# Altium PCB HLib-Sensor-Accel_Gyro-Pressure.PcbDoc
Units mil, origin at the board's own origin, x right, y up, seen from the top; angles counter-clockwise.
Board outline 828 x 2360 mil, 2 copper layers (Top Layer, Bottom Layer); 27 components, 19 nets, 98 pads, 20 vias.
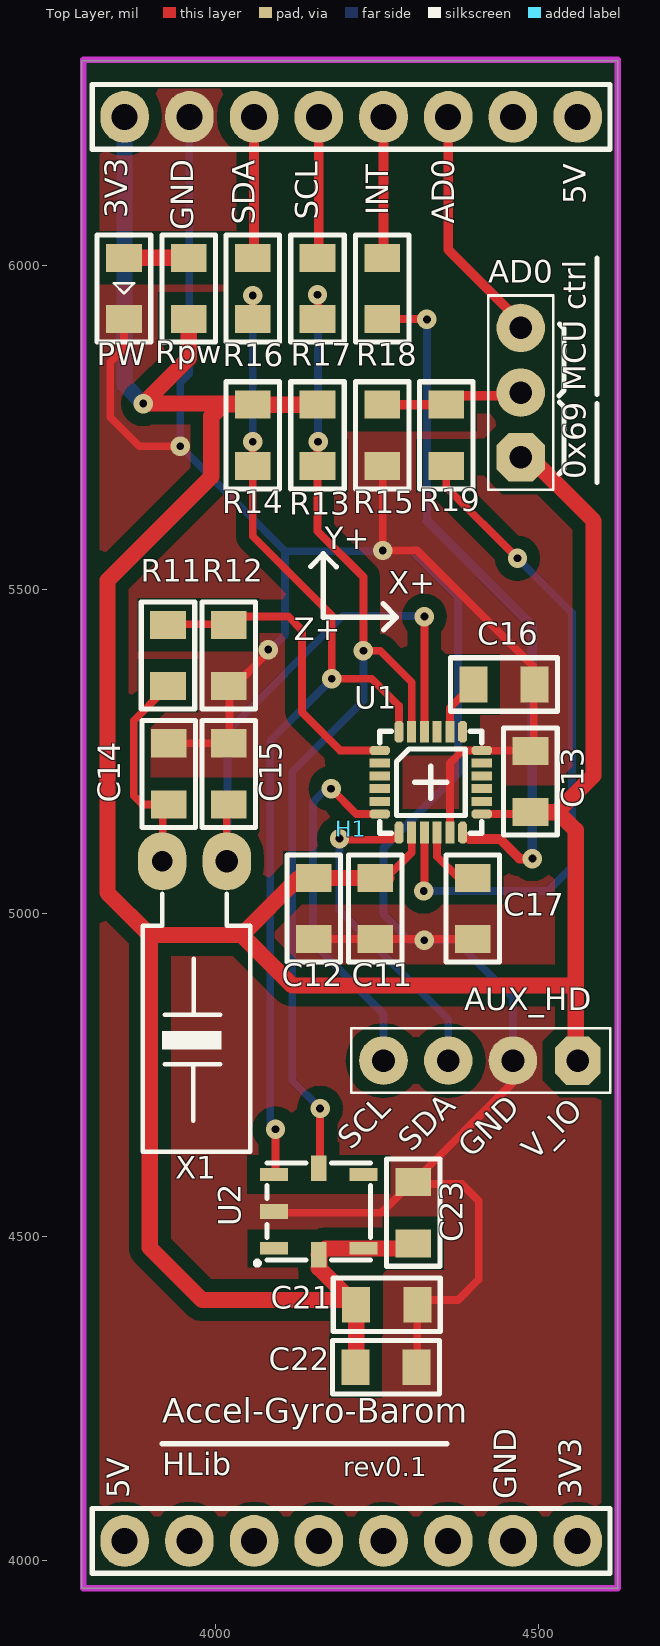
[diagram p0: Top Layer view]
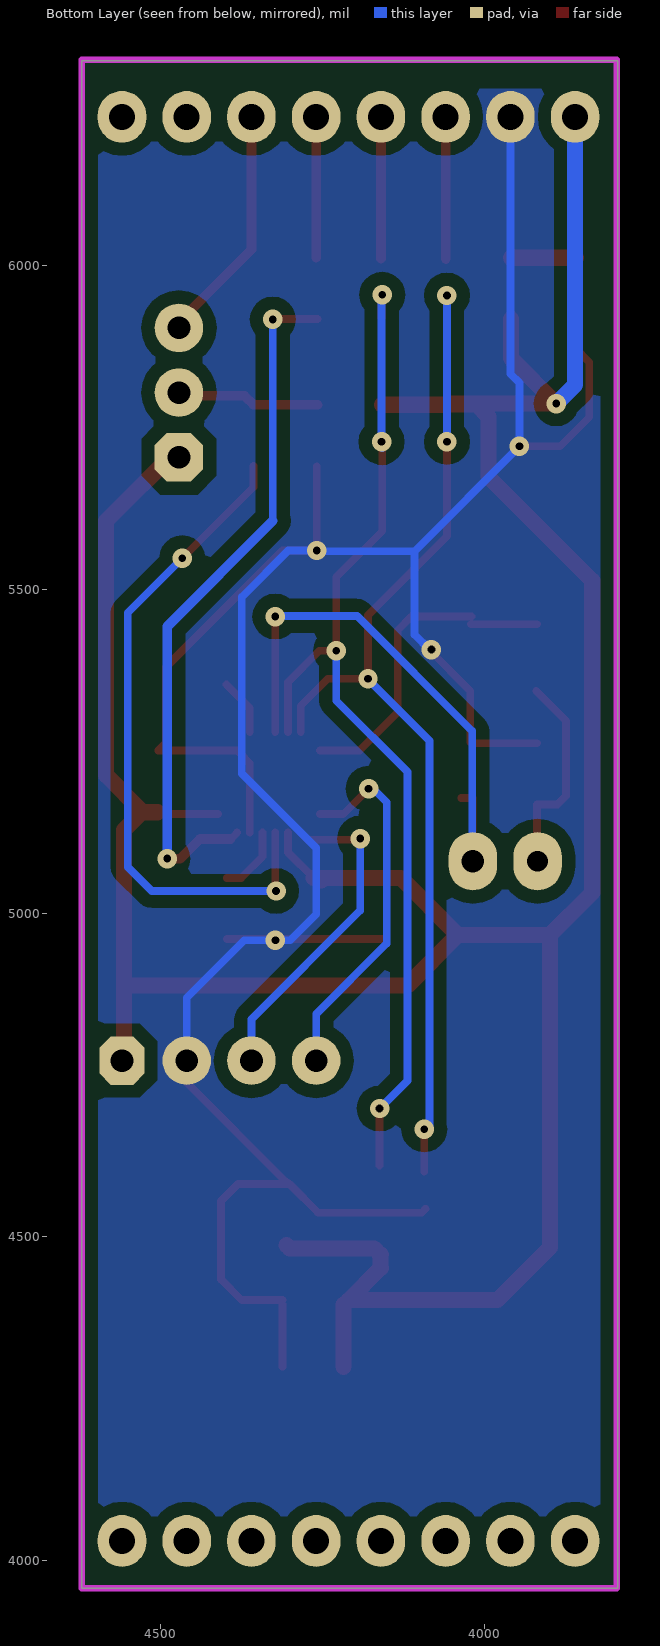
[diagram p1: Bottom Layer view, seen from below]
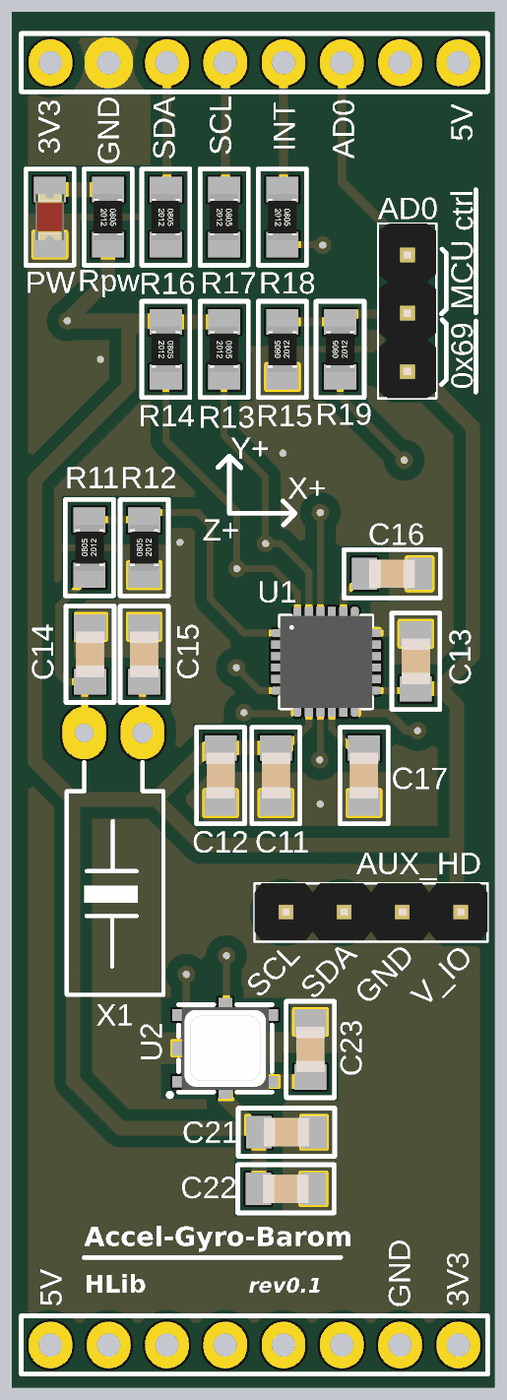
[diagram p2: 3D render of the assembled board from above, using the file's embedded part models]

## Layer stack, top to bottom
Top Layer: signal copper 1.4
Dielectric: core 12.6, FR-4, Dk 4.8
Bottom Layer: signal copper 1.4

## Board outline
3794,6317 4622,6317 4622,3957 3794,3957

## Design rules (kind name [scope] priority, off if disabled: settings)
Clearance [All] p1: gap=20
PolygonConnect [All] p1: connectstyle=Direct reliefconductorwidth=10 reliefentries=4 polygonreliefangle="90 Angle" airgapwidth=10
RoutingVias [All] p1: holewidth=12 width=30 viastyle="Through Hole" minholewidth=10 minwidth=25 maxholewidth=28 maxwidth=50
SolderMaskExpansion [All] p1: expansion=4
Width [All] p1: maxlimit=25 minlimit=12 preferedwidth=12
28 further rules are at their usual default settings.

## Components (designator, comment, footprint, x,y, rotation, side; value= is the part's Value field where it differs from the comment)
AD0 "HEADER 3" HD_MALE_3 4472,5704 r90 top
AUX_HD "HEADER 4" HD_MALE_4 4560,4772 r180 top
C11 "CAP" SM_0805_C_CERAMIC 4247,5007 r90 top
C12 "CAP" SM_0805_C_CERAMIC 4152,5007 r90 top
C13 "CAP" SM_0805_C_CERAMIC 4487,5203 r270 top
C14 "CAP" SM_0805_C_CERAMIC 3928,5215 r270 top
C15 "CAP" SM_0805_C_CERAMIC 4021,5215 r270 top
C16 "CAP" SM_0805_C_CERAMIC 4446,5353 r180 top
C17 "CAP" SM_0805_C_CERAMIC 4398,5007 r90 top
C21 "CAP" SM_0805_C_CERAMIC 4265,4395 r180 top
C22 "CAP" SM_0805_C_CERAMIC 4264,4298 r180 top
C23 "CAP" SM_0805_C_CERAMIC 4306,4537 r270 top
H1 "MBoard1_BH_DualPorts" MBoard1_BH_DualPorts 3860,6230 r0 top
PW "LED" SM_0805_LED 3859,5965 r270 top
R11 "R" SM_0805_R 3927,5398 r90 top
R12 "R" SM_0805_R 4021,5398 r90 top
R13 "R" SM_0805_R 4158,5738 r270 top
R14 "R" SM_0805_R 4058,5738 r270 top
R15 "R" SM_0805_R 4258,5738 r90 top
R16 "R" SM_0805_R 4058,5965 r270 top
R17 "R" SM_0805_R 4158,5965 r270 top
R18 "R" SM_0805_R 4258,5965 r270 top
R19 "R" SM_0805_R 4357,5738 r90 top
Rpw "R" SM_0805_R 3959,5965 r270 top
U1 "MPU-6050" QFN-24 4333,5202 r0 top
U2 "BMP180" LGA-7 4160,4539 r90 top
X1 "32,768 Khz" XT32k 4018,5080 r270 top

## Footprints (in the part's own frame and the unit in brackets; to place one, negate y for a bottom-side part, rotate by r counter-clockwise, add the part's x,y. Pads: shape width x height; smd on the part's side, far side on the other; paste and mask are expansions set on the pad)
HD_MALE_3 [mil]
  oct 75x75 hole 35: 1(0,0)
  round 75 hole 35: 2(100,0) 3(200,0)
  silkscreen extent -50,-50 250,50, body extent -50,-50 250,49, height 323
HD_MALE_4 [mil]
  oct 70x75 hole 35: 1(0,0)
  round 75 hole 35: 2(100,0) 3(200,0) 4(300,0)
  silkscreen extent -50,-50 350,50, body extent -50,-50 350,48, height 323
LGA-7 [mm] "LGA 7pins 3.6x3.8x0.93 (mm)"
  rect 0.5x1.1 smd: 1(-1.45,1.75) 3(-1.45,-1.75) 4(1.45,-1.75) 6(1.45,1.75)
  rect 1x0.6 smd: 2(-1.7,0) 5(1.7,0)
  rect 0.6x1.1 smd: 7(0,1.75)
  silkscreen extent -2.08,-2.03 1.91,2.46, body extent -1.8,-1.9 1.8,1.9, height 0.98
MBoard1_BH_DualPorts [mil]
  oval 75x80 hole 40.16: 1(0,0) 2(100,0) 3(200,0) 4(300,0) 5(400,0) 6(500,0) 7(600,0) 8(700,0) 9(700,-2200) 10(600,-2200) 11(500,-2200) 12(400,-2200) 13(300,-2200) 14(200,-2200) 15(100,-2200) 16(0,-2200)
  silkscreen extent -50,-2250 750,50, body extent -50,-2250 750,50, height 315
QFN-24 [mm] "24 Lead QFN (4x4x0.9) mm"
  oct 0.8x0.35 smd: 1(-2,1.25) 6(-2,-1.25) 13(2,-1.25) 18(2,1.25)
  rect 0.8x0.35 smd: 2(-2,0.75) 3(-2,0.25) 4(-2,-0.25) 5(-2,-0.75) 14(2,-0.75) 15(2,-0.25) 16(2,0.25) 17(2,0.75)
  oct 0.35x0.85 smd: 7(-1.25,-1.975) 12(1.25,-1.975) 19(1.25,1.975) 24(-1.25,1.975)
  rect 0.35x0.85 smd: 8(-0.75,-1.975) 9(-0.25,-1.975) 10(0.25,-1.975) 11(0.75,-1.975) 20(0.75,1.975) 21(0.25,1.975) 22(-0.25,1.975) 23(-0.75,1.975)
  silkscreen extent -2,-2 2,2, body extent -2,-2 2,2, height 0.9
SM_0805_C_CERAMIC [mm] "General Surface-mount cap, low density"
  rect 1.1x1.4 smd: 1(-1.2,0) 2(1.2,0)
  silkscreen extent -2.1,-1.05 2.1,1.05, body extent -1,-0.62 1,0.63, height 0.58
SM_0805_LED [mm] "General polarized surface-mount Led, low density"
  rect 1.1x1.4 smd: 1(-1.2,0) 2(1.2,0)
  silkscreen extent -2.1,-1.05 2.1,1.05, body extent -1.01,-0.62 1.01,0.63, height 1.1
SM_0805_R [mm] "General Surface-mount resistor, low density"
  rect 1.1x1.4 smd: 1(-1.2,0) 2(1.2,0)
  silkscreen extent -2.1,-1.05 2.1,1.05, body extent -1,-0.63 1,0.62, height 0.45
XT32k [mil] "Crystal 32k, 2 pin, real timer for DS1307"
  oval 90x75 hole 35: 1(0,0)
  oval 90x75 hole 32: 2(0,-100)
  silkscreen extent 50,-130 449,36

## Part data
AD0: library part HD_3, "Header single row 3 pins"
AUX_HD: library part HD_4, "Header single row 4 pins"
C11 C12 C13 C14 C15 C16 C17 C21 C22 C23: "Capacitor"
R11 R12 R13 R14 R15 R16 R17 R18 R19 Rpw: "Resistor"
U1: library part MPU_6050, "Motion processing unit"
U2: "Bosch's Digital pressure sensor"
X1: library part XT32k, "Crystal 32,768kHz for timer real"

## Via types
v1: diameter 30, hole 12, Top Layer to Bottom Layer, tented both sides, 20 vias

## Nets (pads, with @x,y where several pads share a name; then routed paths per layer and width w, separated by ;. In a path a pad name is that pad's centre, name@x,y a point inside that pad or via, vN(x,y) a via of type N, cw(c..) or ccw(c..) an arc to the next point about the centre after c; other vN are vias at no path point)
3V3: AD0.1 AUX_HD.1 C11.2 C12.2 C13.2 C21.2 C22.2 C23.2 H1.1 R13.1 R14.1 Rpw.2 U1.8 U1.13 U2.2 U2.3 | length 5190.3
  Top Layer w12: C11.2@4264.24,5054.24 4303.47,5093.47 U1.8 ; U1.13 C13.2@4505,5152.79
  Top Layer w25: Rpw.2 3959,5857 v1(3889,5787) R14.1@4054,5787 ; R14.1@4055,5786 4013,5786 3994,5767 3994,5674 3833.5,5513.5 3833.5,5031.5 3899,4966 ; R14.1 R13.1 ; 4160,4451.74 4160.76,4450.99 ; U2.2 U2.2@4160.76,4472.07 ; C22.2@4217.76,4299 C21.2 ; C11.2@4251,5054.24 C11.2 4129.24,5054.24 4041,4966 ; C11.2@4252,5050 4256.24,5054.24 C11.2@4264.24,5054.24 ; C23.2@4306,4486.76 4301.16,4481.91 U2.3 4170.6,4481.91 U2.2@4160.76,4472.07 ; AD0.1@4472,5713 4477.18,5713 4584.5,5605.68 4584.5,5212.5 4527.76,5155.76 ; C13.2@4505,5155.76 4529.24,5155.76 4557,5128 AUX_HD.1@4557,4772 ; 4557,4888 4119,4888 4041,4966 ; 3899,4966 3899,4483 3980,4402 4209.74,4402 4160.76,4450.99 ; 3899,4966 4041,4966 ; 4160.76,4450.99 U2.2@4160.76,4472.07
  Bottom Layer w25: H1.1 3860,5816 v1(3889,5787)
GND: AUX_HD.2 C11.1 C12.1 C13.1 C14.1 C15.1 C16.1 C17.1 C21.1 C22.1 C23.1 H1.2 PW.2 R12.1 R15.1 U1.11 U1.18 U2.7 | length 4638.7
  Top Layer w8: U1.18@4411.55,5251.02 U1.18
  Top Layer w12: PW.2 3859,5872 3838,5851 3838,5765.88 3882.88,5721 v1(3946,5721) ; C14.1@3919,5262.24 C15.1@4020,5262.24 ; C15.1@4022,5264.24 4022,5343 v1@4084,5405 ; U2.7@4091.1,4543 4097.1,4537 4257,4537 4301.24,4581.24 4380.76,4581.24 4407,4555 4407,4434 4375,4402 C21.1@4312.24,4402 ; C12.1@4154,4959.76 C11.1 C17.1 ; R15.1@4259,5689.76 v1(4259,5560) 4312,5560 4492,5380 4492,5263.24 4504.03,5251.21 U1.18 ; C23.1 4460,4738.24 AUX_HD.2 ; C22.1@4312.24,4299 C21.1 ; U1.11 4362.53,5231.53 4376.02,5245.02 ; 4377.01,5246.01 4382.02,5251.02 U1.18@4411.55,5251.02
  Bottom Layer w12: H1.2 3960,5833 3946,5819 v1(3946,5721) 4108,5559 ; v1@4085,5407 4108,5430 4108,5559 ; v1@4258,5559 4108,5559 ; v1(4259,5560) 4303,5560 4375,5488 4375,5215.46 4260,5100.46 4260,4998 4300,4958 v1(4323,4958) 4371,4958 4460,4869 AUX_HD.2
  other v1: 4082,5407
NetAD0_2: AD0.2 R15.2 R19.2 | length 225.2
  Top Layer w15: R15.2 R19.2 4370.76,5799 4458.76,5799 AD0.2@4472,5812.24
NetAD0_3: AD0.3 H1.6 | length 363.4
  Top Layer w15: H1.6 4360,6025 AD0.3@4472,5913
NetAUX_HD_3: AUX_HD.3 U1.7 | length 493.9
  Top Layer w12: v1@4192,5113.24 4272.79,5113.24 U1.7
  Bottom Layer w12: 4192,5100 4192,5004 4360,4836 AUX_HD.3
  other v1: 4192,5115
NetAUX_HD_4: AUX_HD.4 U1.6 | length 563.9
  Top Layer w12: v1(4179,5192) 4218.21,5152.79 U1.6
  Bottom Layer w12: v1@4171,5191 4151,5171 4151,4953 4260,4844 AUX_HD.4
NetC14_2: C14.2 R11.1 X1.2 | length 320.3
  Top Layer w12: X1.2@3919,5079 3919,5167.76 3887.24,5167.76 3874,5181 3874,5297 R11.1@3920,5343
NetC15_2: C15.2 U1.22 X1.1 | length 871.5
  Top Layer w12: X1.1 4018,5177.76 C15.2@4035.76,5177.76 ; U1.22 v1(4323.16,5458)
  Bottom Layer w12: X1.1@4019,5079 4019,5281 4197,5459 v1@4321,5459
NetC16_2: C16.2 U1.20 | length 88.3
  Top Layer w12: U1.20 4362.53,5316.77 C16.2
NetC17_2: C17.2 U1.10 | length 105.9
  Top Layer w12: U1.10 4342.84,5087.16 4375.76,5054.24 C17.2
NetH1_3: H1.3 R16.1 | length 219.8
  Top Layer w15: R16.1@4060,6010.24 H1.3
NetH1_4: H1.4 R17.1 | length 218.8
  Top Layer w15: R17.1@4160,6011.24 H1.4
NetH1_5: H1.5 R18.1 | length 217.8
  Top Layer w15: R18.1@4260,6012.24 H1.5
NetPW_1: PW.1 Rpw.1 | length 100
  Top Layer w25: PW.1 Rpw.1
NetR11_2: R11.2 R12.2 U1.1 | length 496.4
  Top Layer w12: R11.2@3919,5446 R12.2@4021,5446 ; R12.2@4020,5458.24 4112.76,5458.24 4134,5437 4134,5310 4192.79,5251.21 U1.1
NetR13_2: R13.2 R17.2 U1.23 U2.5 | length 1642.8
  Top Layer w12: v1@4158,5718 R13.2 4158,5590 4229,5519 v1(4229,5405) 4255,5405 4303.47,5356.53 U1.23 ; R17.2@4159,5918.76 v1@4159,5955 ; U2.5@4162,4609.93 v1(4162,4698)
  Bottom Layer w12: v1@4158,5718 4158,5728 4159,5729 v1@4159,5952 ; v1(4162,4698) 4119,4741 4119,5218 4229,5328 v1(4229,5405)
  other v1: 4159,5728 4158,5955
NetR14_2: R14.2 R16.2 U1.24 U2.6 | length 1631.3
  Top Layer w12: v1@4058,5718 R14.2 4058,5582 4180,5460 v1(4180,5362) 4242,5362 4283.79,5320.21 U1.24 ; R16.2 v1(4058,5954) ; U2.6@4093.1,4600.09 v1(4093.1,4665.9)
  Bottom Layer w12: v1(4058,5728) v1(4058,5954) ; v1@4085,4665.9 4085,5266 v1@4180.5,5361.5
NetR18_2: R18.2 U1.12 | length 1094.3
  Top Layer w12: R18.2 4326.24,5917.76 v1(4327,5917) ; U1.12 4392.27,5114.18
  Top Layer w15: 4392.27,5114.18 4439.82,5114.18 4470,5084 v1(4490,5084)
  Bottom Layer w12: 4327,5606 v1(4327,5917)
  Bottom Layer w15: 4327,5606 4490,5443 v1(4490,5084)
NetR19_1: R19.1 U1.9 | length 1037.5
  Top Layer w12: v1(4322,5034) 4323.16,5032.84 U1.9 ; R19.1 4357,5658 v1(4467,5548)
  Bottom Layer w12: v1(4322,5034) 4514,5034 4551,5071 4551,5464 v1(4467,5548)
pads on no net: H1.7 H1.8 H1.9 H1.10 H1.11 H1.12 H1.13 H1.14 H1.15 H1.16 U1.2 U1.3 U1.4 U1.5 U1.14 U1.15 U1.16 U1.17 U1.19 U1.21 U2.1 U2.4

## Polygon pours and split planes (outlines as drawn)
GND on Top Layer "Top Overlay-No Net" (solid, remove dead copper, pour order 4): 3796,6299 4622,6299 4622,3957 3796,3957
GND on Bottom Layer "Top Overlay-No Net" (solid, remove dead copper, pour order 6): 3796,6299 4622,6299 4622,3957 3796,3957

## Keep-outs
Keep-Out Layer:
  lines w10: 3796,3957 3796,6318 4622,6318 4622,3957 3796,3957

## Silkscreen, mask and mechanical layers (free items; w line width, h text height)
Top Overlay:
  lines w8: 3918,4180 4358,4180 ; 4147.5,5535.5 4167,5555 ; 4187,5535 4167,5555 ; 4259,5478 4280,5457 ; 4260,5437 4280,5457 ; 4531,5678 4539,5686 4539,5782 ; 4531,5799 4539,5807 4539,5903 ; 4532,5789 4538,5783 ; 4532,5910 4538,5904 ; 4590,5665 4590,5786.79 ; 4590,5801 4590,6011.89 ; 4167,5555 4167,5457 4280,5457
  text "5V" at 4584,6095 h60 r90
  text "INT" at 4279,6078 h60 r90
  text "3V3" at 3876,6073 h60 r90
  text "SCL" at 4170,6071 h60 r90
  text "AD0" at 4381,6065 h60 r90
  text "SDA" at 4073,6063 h60 r90
  text "GND" at 3978,6055 h60 r90
  text "MCU ctrl" at 4584.36,5806 h60 r90
  text "0x69" at 4584.36,5670 h60 r90
  text "Y+" at 4169,5550 h60
  text "X+" at 4267,5482 h60
  text "Z+" at 4121,5410 h60
  text "SCL" at 4218,4624 h60 r45
  text "SDA" at 4311,4621 h60 r45
  text "GND" at 4404,4612 h60 r45
  text "V_IO" at 4502,4608 h60 r45
  text "Accel-Gyro-Barom" at 3918,4200 h65
  text "HLib" at 3918,4120 h60
  text "rev0.1" at 4198,4120 h50
  text "5V" at 3879,4096 h60 r90
  text "3V3" at 4577,4096 h60 r90
  text "GND" at 4477,4094 h60 r90

## Dimensions
3796,3957 to 3796,6318 on Mechanical 1
3796,3957 to 4622,3957 on Mechanical 1